# Altium PCB Mach_Dieu_Khien_Binh_Nuoc_Nong.PcbDoc
Units mil, origin at the board's own origin, x right, y up, seen from the top; angles counter-clockwise.
Board outline 4700 x 3120 mil, 2 copper layers (Top Layer, Bottom Layer), stack 65.792 mil thick; 73 components, 63 nets, 232 pads, 29 vias.
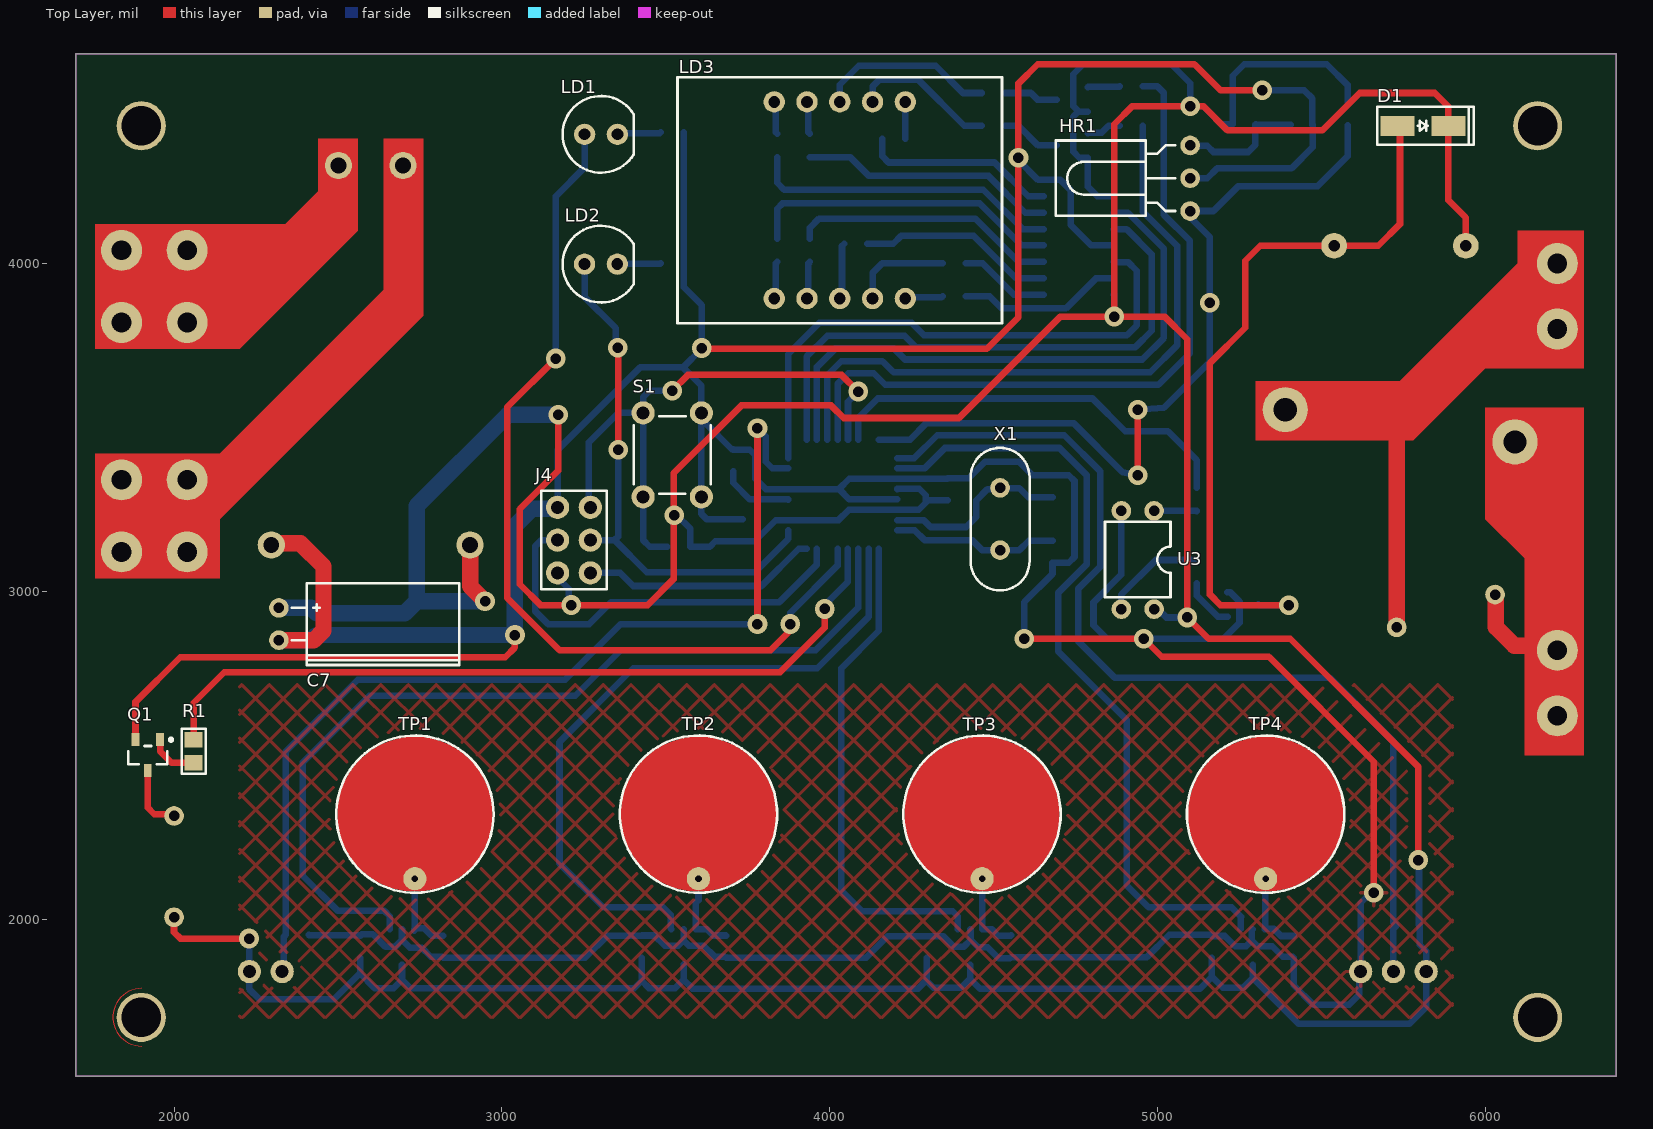
[diagram p0: Top Layer view]
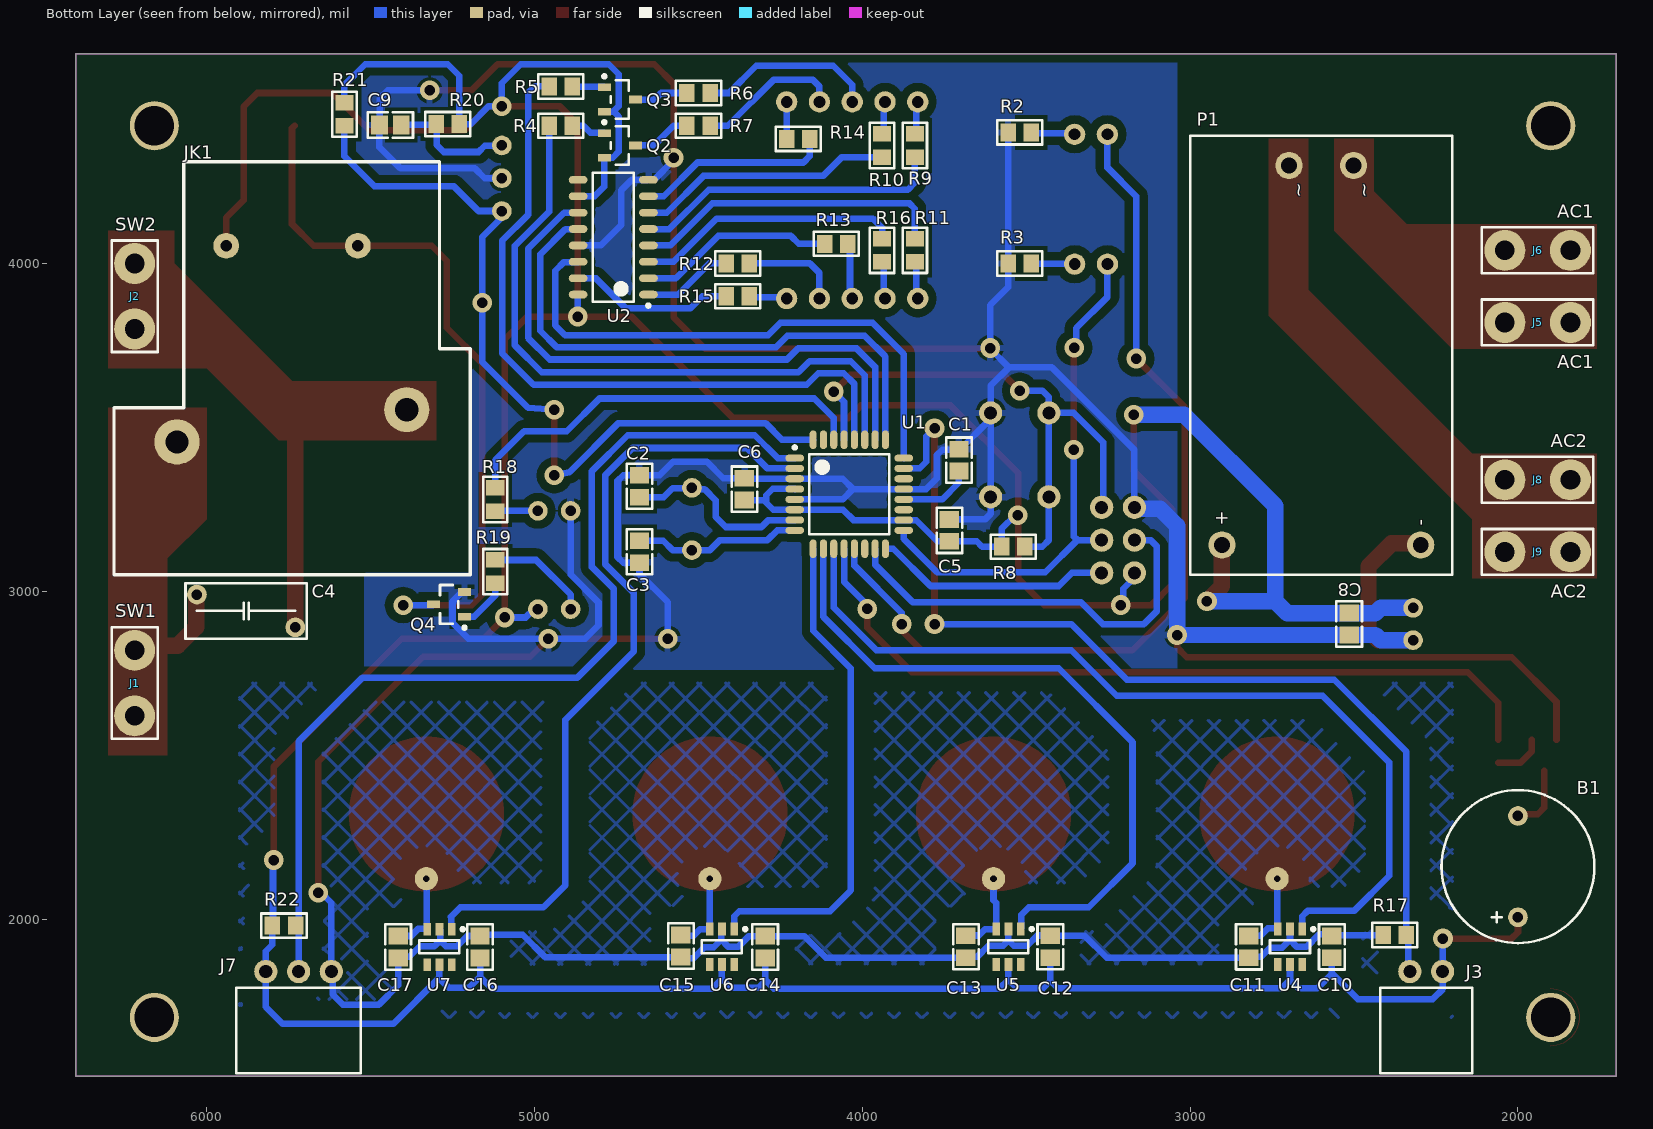
[diagram p1: Bottom Layer view, seen from below]
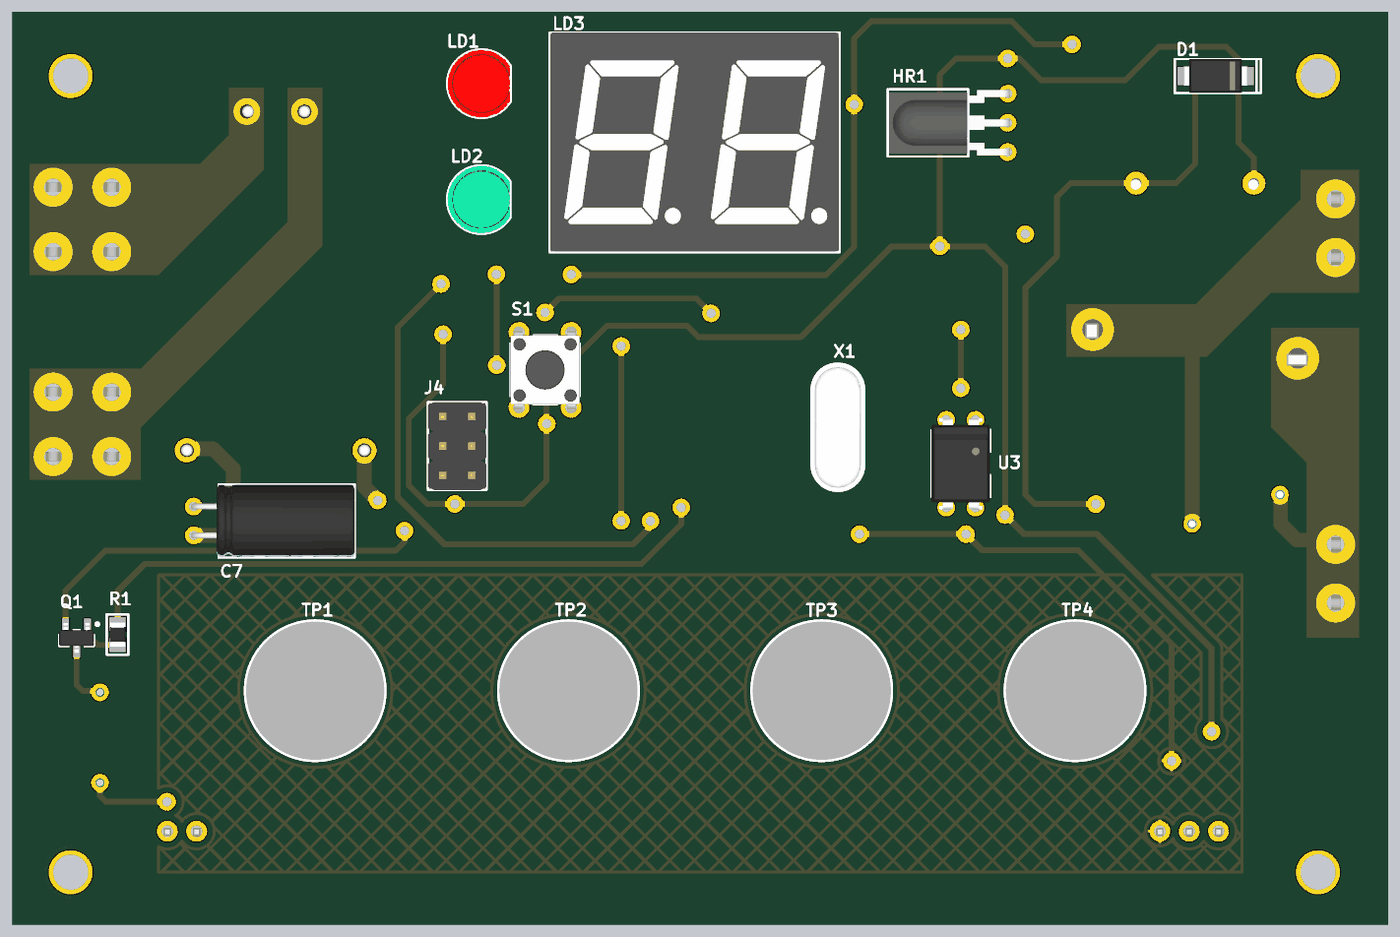
[diagram p2: 3D render of the assembled board from above, using the file's embedded part models]
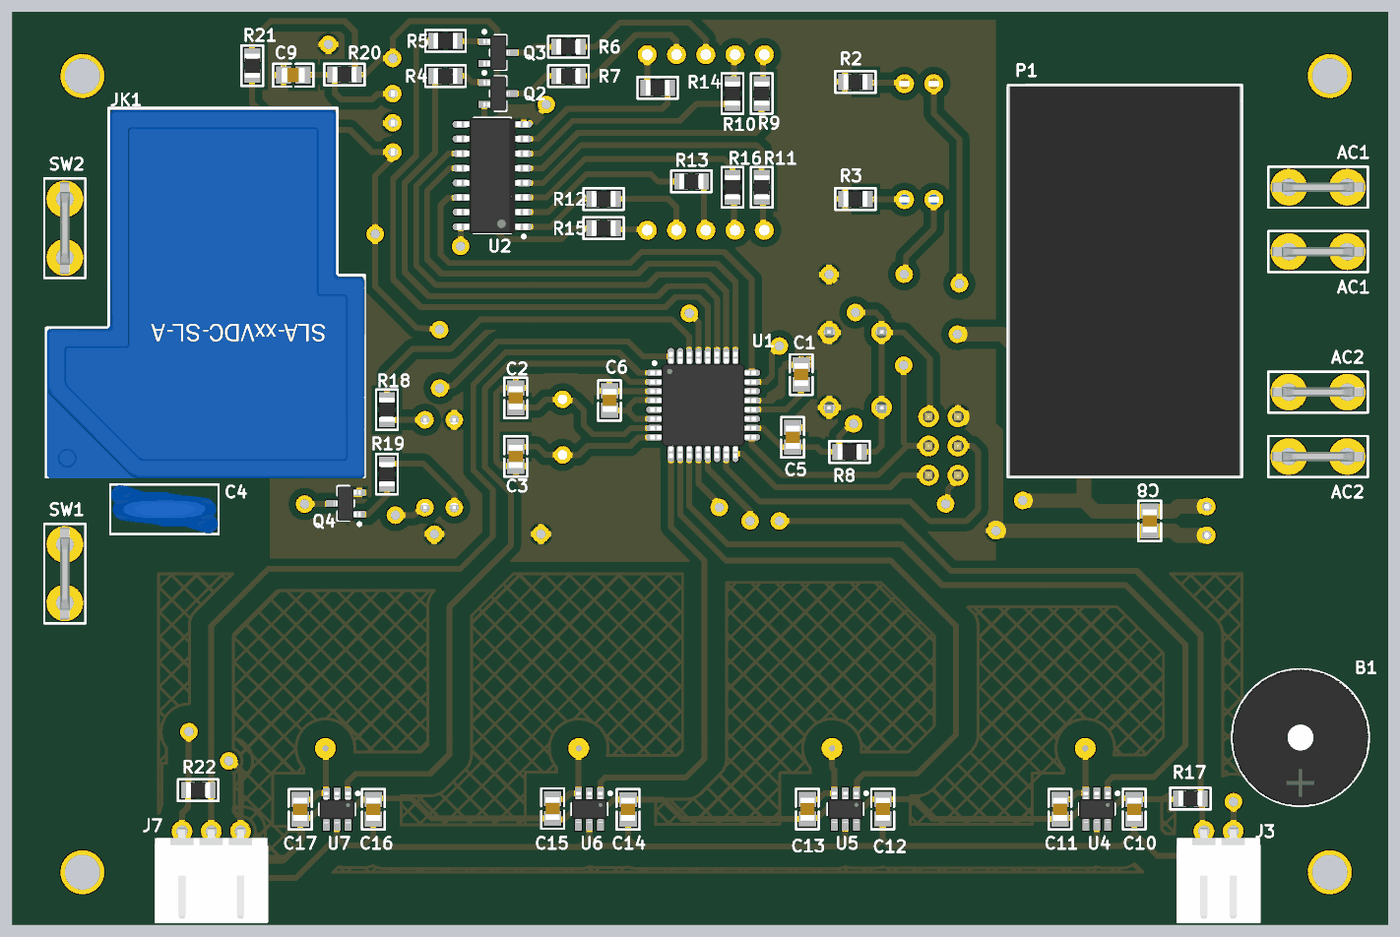
[diagram p3: 3D render of the assembled board from below, using the file's embedded part models]

## Layer stack, top to bottom
Top Solder: solder mask 0.4, Solder Resist, Dk 3.5
Top Layer: signal copper 1.4
Dielectric 1: dielectric 62.9921, FR-4, Dk 4.8
Bottom Layer: signal copper 1.4
Bottom Solder: solder mask 0.4, Solder Resist, Dk 3.5

## Board outline
1700,1520 1700,4640 6400,4640 6400,1520

## Design rules (kind name [scope] priority, off if disabled: settings)
Clearance Clearance_25mil [InNamedPolygon('Bottom Layer-GND')] p1: gap=25 ignorepadtopadclearanceinfootprint=FALSE
Clearance Clearance_60mil [InNamedPolygon('Bottom Touch-GND')] p2: gap=60 ignorepadtopadclearanceinfootprint=FALSE
Clearance Clearance_20mil [InNamedPolygon('Top Touch-GND')] p3: gap=20 ignorepadtopadclearanceinfootprint=FALSE
Clearance [All] p4: gap=7 ignorepadtopadclearanceinfootprint=FALSE
PolygonConnect PolygonConnect_1 [All vs IsNamedPolygon('Bottom Layer-GND')] p1: connectstyle=Relief reliefconductorwidth=20 reliefentries=4 polygonreliefangle="90 Angle" airgapwidth=10
PolygonConnect [All] p2: connectstyle=Relief reliefconductorwidth=10 reliefentries=4 polygonreliefangle="90 Angle" airgapwidth=10
RoutingVias [All] p1: holewidth=28 width=50 viastyle="Through Hole" minholewidth=28 minwidth=50 maxholewidth=32 maxwidth=68
SolderMaskExpansion [All] p1: expansion=4
Width [All] p1: maxlimit=50 minlimit=10 preferedwidth=20
30 further rules are at their usual default settings.

## Classes and differential pairs
component class MD_TOUCH: C10 C11 C12 C13 C14 C15 C16 C17 TP1 TP2 TP3 TP4 U4 U5 U6 U7
component class Mach_Dieu_Khien_Binh_Nuoc_Nong: B1 C1 C2 C3 C4 C5 C6 C7 C8 C9 D1 HR1 J1 J2 J3 J4 J5 J6 J7 J8 J9 JK1 LD1 LD2 LD3 P1 Q1 Q2 Q3 Q4 R1 R2 R3 R4 R5 R6 R7 R8 R9 R10 R11 R12 R13 R14 R15 R16 R17 R18 R19 R20 R21 R22 S1 U1 U2 U3 X1

## Components (designator, comment, footprint, x,y, rotation, side; value= is the part's Value field where it differs from the comment)
B1 "BUZZER" BUZZER-12X8.5MM 2000,2160 r90 bottom
C1 "100nF" C-0805 3705.4,3400 r270 bottom
C2 "22pF" C-0805 4680,3320.54 r90 bottom
C3 "22pF" C-0805 4680,3120.54 r270 bottom
C4 "220nF" C-7.62 5880,2940 r180 bottom
C5 "100nF" C-0805 3734.65,3185.76 r270 bottom
C6 "100nF" C-0805 4360,3311.54 r270 bottom
C7 "470uF" C-ELE-2.5-6.3X12MM-A 2320,2900 r0 top
C8 "100nF" C-0805 2515,2900 r90 bottom
C9 "100nF" C-0805 5440,4422.57 r180 bottom
C10 "100nF" C-0805 2567.95,1915.15 r270 bottom
C11 "22pF" C-0805 2821.17,1915.15 r90 bottom
C12 "100nF" C-0805 3426.75,1915.46 r270 bottom
C13 "22pF" C-0805 3684.18,1915.46 r90 bottom
C14 "100nF" C-0805 4296.4,1914.73 r270 bottom
C15 "22pF" C-0805 4553.83,1917.6 r90 bottom
C16 "100nF" C-0805 5166.32,1914.83 r270 bottom
C17 "22pF" C-0805 5415.99,1914.83 r90 bottom
D1 "M7" SMA_DO-214AC 5820,4420 r0 top
HR1 "VS1838B" VS1838B-A 5100,4260 r90 top
J1 "SW1" FASTON-6.3X0.8MM 6220,2720 r90 bottom
J2 "SW2" FASTON-6.3X0.8MM 6220,3900 r90 bottom
J3 "XH1X2-2.54" XH1X2M-2.54-A 2280,1840 r0 bottom
J4 "JP2X3-2.54" JP2X3M-2.54 3220,3156 r90 top
J5 "AC1" FASTON-6.3X0.8MM 1940,3820 r180 bottom
J6 "AC1" FASTON-6.3X0.8MM 1940,4040 r180 bottom
J7 "XH1X3-2.54" XH1X3M-2.54-A 5720,1840 r0 bottom
J8 "AC2" FASTON-6.3X0.8MM 1940,3340 r180 bottom
J9 "AC2" FASTON-6.3X0.8MM 1940,3120 r0 bottom
JK1 "SLA-5VDC-SL-A" SLA-xxVDC-SL-A 5740,3680 r0 bottom locked
LD1 "LED" LED-5MM-RED 3302.6,4393.89 r0 top
LD2 "LED" LED-5MM-GREEN 3302.4,3997.92 r0 top
LD3 "LED7-0.56IN-2-A" LED7-0.56IN-2 3831,3893 r0 top locked
P1 "HI-LINK-HLK-PM01" HI-LINK-HLK-PMXX 2600,3720 r270 bottom
Q1 "J3Y" SOT23-3L_TO-236AB 1920,2500 r270 top
Q2 "S8550 (2TY)" SOT23-3L_TO-236AB 4740,4360 r180 bottom
Q3 "S8550 (2TY)" SOT23-3L_TO-236AB 4740,4500 r180 bottom
Q4 "J3Y" SOT23-3L_TO-236AB 5261.02,2960 r0 bottom
R1 "1k" R-0805 2060,2511.81 r270 top
R2 "1k" R-0805 3520,4400 r0 bottom
R3 "220R" R-0805 3520,4000 r0 bottom
R4 "2.2k" R-0805 4920,4420 r180 bottom
R5 "2.2k" R-0805 4920,4540 r180 bottom
R6 "10R" R-0805 4500,4520 r0 bottom
R7 "10R" R-0805 4500,4420 r0 bottom
R8 "10k" R-0805 3540,3136 r0 bottom
R9 "220R" R-0805 3840,4360 r90 bottom
R10 "220R" R-0805 3940,4360 r90 bottom
R11 "220R" R-0805 3840,4040 r270 bottom
R12 "220R" R-0805 4380,4000 r180 bottom
R13 "220R" R-0805 4080,4060 r180 bottom
R14 "220R" R-0805 4195.43,4380 r0 bottom
R15 "220R" R-0805 4380,3900 r180 bottom
R16 "220R" R-0805 3940,4040 r270 bottom
R17 "10k" R-0805 2375.88,1951.61 r180 bottom
R18 "1k" R-0805 5120,3280 r270 bottom
R19 "10k" R-0805 5120,3060 r270 bottom
R20 "100R" R-0805 5265,4425 r180 bottom
R21 "10k" R-0805 5580,4455.43 r90 bottom
R22 "10k" R-0805 5764.56,1980 r0 bottom
S1 "SW4P-DIP" SW4P-DIP-6X6MM 3520,3416 r270 top
TP1 "TP-ROUND" TP-ROUND-12MM 2735,2320 r90 top
TP2 "TP-ROUND" TP-ROUND-12MM 3600,2320 r90 top
TP3 "TP-ROUND" TP-ROUND-12MM 4465,2320 r90 top
TP4 "TP-ROUND" TP-ROUND-12MM 5330,2320 r90 top
U1 "ATMEGA328-AU" TQFP32-0.8-7X7MM_MS-026ABA 4040,3296 r180 bottom
U2 "74HC595" SOIC16-1.27-150MIL_MS-012AC 4760,4080 r0 bottom
U3 "PC817" DIP4-2.54-300MIL_BLACK 4940,3095.43 r180 top
U4 "TTP223-BA6" SOT23-6L_MO-178AB 2695.55,1915.15 r270 bottom
U5 "TTP223-BA6" SOT23-6L_MO-178AB 3554.41,1915.46 r270 bottom
U6 "TTP223-BA6" SOT23-6L_MO-178AB 4428.44,1915.15 r270 bottom
U7 "TTP223-BA6" SOT23-6L_MO-178AB 5290.23,1914.83 r270 bottom
X1 "16MHz" XTAL-HC49US 4520,3220.54 r90 top

## Footprints (in the part's own frame and the unit in brackets; to place one, negate y for a bottom-side part, rotate by r counter-clockwise, add the part's x,y. Pads: shape width x height; smd on the part's side, far side on the other; paste and mask are expansions set on the pad)
BUZZER-12X8.5MM [mil]
  round 60 hole 32: 1(-154.53,0) 2(154.53,0)
  silkscreen extent -233,-233 233,233, body extent -233,-233 233,233, height 325
C-7.62 [mil]
  round 60 hole 32: 1(-150,50) 2(150,-50)
  silkscreen extent -185,-85 185,85, body extent -183,-83 183,83, height 457
C-0805 [mm]
  rect 1.3x1.5 smd: 1(-0.85,0) 2(0.85,0)
  silkscreen extent -1.75,-0.99 1.75,0.99, body extent -1,-0.62 1,0.63, height 1
C-ELE-2.5-6.3X12MM-A [mil]
  round 60 hole 32: 1(0,49.21) 2(0,-49.21)
  silkscreen extent 40,-125 550,125, body extent -10,-124 551,124, height 252
DIP4-2.54-300MIL_BLACK [mil]
  round 60 hole 32: 1(-50,-150) 2(50,-150) 3(50,150) 4(-50,150)
  silkscreen extent -100,-116 100,114, body extent -100,-156 100,156, height 189
FASTON-6.3X0.8MM [mil]
  round 125 hole 60: 1(-100,0) 2(100,0)
  silkscreen extent -170,-70 170,70, body extent -157,-16 157,16, height 395
HI-LINK-HLK-PMXX [mil]
  round 83 hole 48: 1(-578.74,98.43) 2(-578.74,-98.43) 3(578.74,-303.15) 4(578.74,303.15)
  silkscreen extent -670,-400 670,400, body extent -669,-398 669,398, height 591
JP2X3M-2.54 [mil]
  round 71 hole 40: 1(-100,-50) 2(-100,50) 3(0,-50) 4(0,50) 5(100,-50) 6(100,50)
  silkscreen extent -150,-100 150,100, body extent -150,-100 150,100, height 337
LED7-0.56IN-2 [mil]
  round 65 hole 36: 1(0,0) 2(100,0) 3(200,0) 4(300,0) 5(400,0) 6(400,600) 7(300,600) 8(200,600) 9(100,600) 10(0,600)
  silkscreen extent -295,-75 695,675, body extent -292,-73 692,675, height 317
LED-5MM-GREEN [mil]
  round 65 hole 36: 1(-50,0) 2(50,0)
  silkscreen extent -117,-117 100,117, body extent -116,-116 98,116, height 339
LED-5MM-RED [mil]
  round 65 hole 36: 1(-50,0) 2(50,0)
  silkscreen extent -117,-117 100,117, body extent -116,-116 98,116, height 339
R-0805 [mm]
  rect 1.2x1.4 smd: 1(-0.9,0) 2(0.9,0)
  silkscreen extent -1.75,-0.94 1.75,0.94, body extent -1.05,-0.67 1.05,0.68, height 0.6
SLA-xxVDC-SL-A [mm] "一组常开，长：32mm，宽：27.6mm，高：20mm"
  round 2 hole 0.9: 1(-5.1,-9.5) 2(5.1,-9.5)
  round 3.5 hole 1.8: 3(8.91,5.7) 4(-8.89,3.2)
  silkscreen extent -13.8,-16 13.8,16, body extent -13.84,-15.87 13.76,16.13, height 20.65
SMA_DO-214AC [mm]
  rect 2.65x1.55 smd: 1(-2.229,0) 2(1.721,0)
  silkscreen extent -3.8,-1.47 3.68,1.47, body extent -3.05,-1.47 2.55,1.48, height 2.9
SOIC16-1.27-150MIL_MS-012AC [mm]
  oval 1.45x0.6 smd: 1(-2.725,4.445) 2(-2.725,3.175) 3(-2.725,1.905) 4(-2.725,0.635) 5(-2.725,-0.635) 6(-2.725,-1.905) 7(-2.725,-3.175) 8(-2.725,-4.445) 9(2.725,-4.445) 10(2.725,-3.175) 11(2.725,-1.905) 12(2.725,-0.635) 13(2.725,0.635) 14(2.725,1.905) 15(2.725,3.175) 16(2.725,4.445)
  silkscreen extent -2.85,-5 1.6,5.42, body extent -3.1,-5 3.1,5, height 1.75
SOT23-3L_TO-236AB [mm]
  rect 1x0.6 smd: 1(-1.2,0.95) 2(-1.2,-0.95) 3(1.2,0)
  silkscreen extent -1.32,-1.5 0.7,1.93, body extent -1.3,-1.5 1.3,1.5, height 1.1
SOT23-6L_MO-178AB [mm]
  rect 1x0.6 smd: 1(-1.375,0.95) 2(-1.375,0) 3(-1.375,-0.95) 4(1.375,-0.95) 5(1.375,0) 6(1.375,0.95)
  silkscreen extent -1.5,-1.55 0.5,1.92, body extent -1.5,-1.52 1.5,1.53, height 1.45
SW4P-DIP-6X6MM [mil]
  round 71 hole 40: 1(-128,89) 2(-128,-89) 3(128,-89) 4(128,89)
  silkscreen extent -118,-118 118,118, body extent -151,-118 151,118, height 200
TP-ROUND-12MM [mil]
  round 71 hole 20: 1(-196.85,0)
  Top Layer region: 0,-236.22 -90.4,-218.24 -167.03,-167.03 -218.24,-90.4 -236.22,0 -236.22,0 -218.24,90.4 -167.03,167.03 -90.4,218.24 0,236.22 0,236.22 90.4,218.24 167.03,167.03 218.24,90.4 236.22,0 236.22,0 218.24,-90.4 167.03,-167.03 90.4,-218.24 0,-236.22
  silkscreen extent -240,-240 240,240
TQFP32-0.8-7X7MM_MS-026ABA [mm]
  oval 1.45x0.55 smd: 1(-4.225,2.8) 2(-4.225,2) 3(-4.225,1.2) 4(-4.225,0.4) 5(-4.225,-0.4) 6(-4.225,-1.2) 7(-4.225,-2) 8(-4.225,-2.8) 17(4.225,-2.8) 18(4.225,-2) 19(4.225,-1.2) 20(4.225,-0.4) 21(4.225,0.4) 22(4.225,1.2) 23(4.225,2) 24(4.225,2.8)
  oval 0.55x1.45 smd: 9(-2.8,-4.225) 10(-2,-4.225) 11(-1.2,-4.225) 12(-0.4,-4.225) 13(0.4,-4.225) 14(1.2,-4.225) 15(2,-4.225) 16(2.8,-4.225) 25(2.8,4.225) 26(2,4.225) 27(1.2,4.225) 28(0.4,4.225) 29(-0.4,4.225) 30(-1.2,4.225) 31(-2,4.225) 32(-2.8,4.225)
  silkscreen extent -4.35,-3.1 3.1,3.75, body extent -4.6,-4.6 4.6,4.6, height 1.2
VS1838B-A [mil]
  round 60 hole 32: 1(-100,0) 2(0,0) 3(100,0)
  silkscreen extent -115,45 115,410, body extent -112,-8 112,405, height 173
XH1X2M-2.54-A [mil]
  round 71 hole 40: 1(-50,0) 2(50,0)
  silkscreen extent -140,50 140,310, body extent -142,-10 142,307, height 230
XH1X3M-2.54-A [mil]
  round 71 hole 40: 1(-100,0) 2(0,0) 3(100,0)
  silkscreen extent -190,50 190,310, body extent -192,-10 192,307, height 230
XTAL-HC49US [mil]
  round 60 hole 32: 1(-95,0) 2(95,0)
  silkscreen extent -218,-90 217,90, body extent -217,-88 215,88, height 142

## Part data
B1: "Cac Loai Coi Xung/Chip"
C1 C2 C3 C4 C5 C6 C8 C9 C10 C11 C12 C13 C14 C15 C16 C17: library part CAP, "Cac Loai Tu"
C7: library part CAP-ELE, "Cac Loai Tu Hoa"
D1: library part "1N4007 (M7)", "Diode Chinh Luu 1A 1000V"
HR1: "Module Giai Ma IR"
J1 J2 J5 J6 J8 J9: library part FASTON-2P, "Dau Ket Noi Faston 2 Chan"
J3: "Header 2 Chan XH 2.54mm"
J4: "Jump Doi 3 Chan 2.54mm"
J7: "Header 3 Chan XH 2.54mm"
JK1: library part SLA-24VDC-SL-A, "24V????"
LD1 LD2: "Cac Loai LED Don"
LD3: "LED 7 Thanh 0.56 Inch 2 So Anot"
P1: "Nguon Hi-Link HLK-PM01 5V 3W"
Q1 Q4: library part "S8050 (J3Y)", "Transistor NPN 0.5A 40V"
Q2 Q3: "Transistor PNP 0.5A 40V"
R1 R2 R3 R4 R5 R6 R7 R8 R9 R10 R11 R12 R13 R14 R15 R16 R17 R18 R19 R20 R21 R22: library part RES, "Cac Loai Dien Tro"
S1: "Nut Nhan 4 Chan Cac Loai"
TP1 TP2 TP3 TP4: "Cac Loai Nut Cam Ung Cham Tron"
U1: "VDK 8-Bit AVR"
U2: "IC Mo Rong Ngo Ra"
U3: "Opto Quang Transistor"
U4 U5 U6 U7: "IC Cam Ung Cham 1 Kenhpr"
X1: library part XTAL-HC49, "Thach Anh 2 Chan HC49"

## Free pads (board coordinates)
  round 150 hole 120: 2(1900,1700) 3(6160,1700) 4(6160,4420) 5(1900,4420)

## Via types
v1: diameter 60, hole 32, Top Layer to Bottom Layer, 29 vias

## Nets (pads, with @x,y where several pads share a name; then routed paths per layer and width w, separated by ;. In a path a pad name is that pad's centre, name@x,y a point inside that pad or via, vN(x,y) a via of type N, cw(c..) or ccw(c..) an arc to the next point about the centre after c; other vN are vias at no path point)
+5: B1.1 C5.2 C6.2 C7.1 C8.2 C10.2 C12.2 C14.2 C16.2 D1.2 J3.1 J4.2 J7.3 JK1.2 P1.3 Q2.2 Q3.2 R8.2 R20.2 R21.2 R22.2 U1.4 U1.6 U1.18 U2.10 U2.16 U3.4 U4.5 U5.5 U6.5 U7.5 | length 17428.6
  Top Layer w20: B1.1 2000,1960 2019.51,1940.49 v1(2229,1940.49) ; v1(3171.75,3538) 3171.75,3367.75 3054.7,3250.7 3054.7,3021.3 3118,2958 v1(3212,2958) 3445,2958 3524,3037 3524,3230 v1(3526,3232) 3536.82,3232 3524,3244.82 3524,3360.16 3730.84,3567 4004.55,3567 4042.99,3528.56 4394.56,3528.56 4704.11,3838.11 v1(4868.54,3838.11) ; v1(5796.16,2180) 5796.16,2463.84 5405,2855 5156.03,2855 v1(5091.03,2920) 5091.03,3768.97 5021.89,3838.11 v1(4868.54,3838.11) ; JK1.2 5940.79,4140 5887.76,4193.03 D1.2 5887.76,4478 5845.76,4520 5617,4520 5503,4406 5214,4406 5140,4480 v1(5100,4480) 4924,4480 4868.54,4424.54 v1(4868.54,3838.11)
  Top Layer w50: C7.1 C7.1@2320,2951.92 ; P1.3 2903.15,3015.35 v1(2948.75,2969.75)
  Bottom Layer w20: v1(2229,1940.49) 2229,1841 J3.1 2229,1839 2229,1787 2260,1756 2488.81,1756 2567.95,1835.15 C10.2 ; 2567.95,1833.11 2611.92,1789.15 2669.99,1789.15 2695.55,1814.71 ; U4.5 2695.55,1814.71 ; J4.2 3170,3042.2 3204.35,3007.85 3204.35,2965.65 v1(3212,2958) ; C12.2 3426.75,1811.71 ; v1(3526,3232) 3533.98,3232 3575.44,3190.54 R8.2 3635,3136 3651.3,3152.3 C5.2 3771.3,3152.3 3835.94,3216.94 3873.35,3216.94 U1.18 4027.26,3217.26 4058.76,3248.76 U1.6 4271.76,3248.76 4293,3270 ; U5.5 3554.41,1815.09 ; U1.4@4206,3312 4206.42,3312.42 4273.58,3312.42 4293,3293 4293,3270 ; C14.2@4296.44,1881.23 4296.44,1810.64 ; C6.2 4301.07,3278.07 4293,3270 ; U6.5 4428.44,1817.96 ; Q3.2 4757.41,4462.6 ; U2.16 4868.46,3903.82 4868.46,3838.18 v1(4868.54,3838.11) ; U2.10 4866.59,4205.69 4816.31,4205.69 4787.24,4234.76 Q2.2 4761.65,4322.6 4743,4341.25 4743,4448.19 4757.41,4462.6 ; U3.4 5002.19,2945.43 5027.62,2920 v1(5091.03,2920) ; C16.2 5166.32,1823.83 ; U7.5 5291.32,1859.61 5291.32,1819.83 ; R21.2 5580,4544.49 5516.49,4608 5265,4608 5229.56,4572.56 R20.2 5195,4425 5140,4480 v1(5100,4480) 5100,4550 5042,4608 4774,4608 4743,4577 4743,4480 4757.41,4465.59 4757.41,4462.6 ; v1(5796.16,2180) 5798.08,2178.08 5798.08,1981.92 R22.2 5800,1921.61 5820,1901.61 J7.3 5820,1731.9 5768.1,1680 5431.15,1680 5291.32,1819.83 ; 2695.55,1814.71 2721.27,1789 3404.03,1789 3426.75,1811.71 ; 3426.75,1811.71 3449,1789.46 3528.78,1789.46 3554.41,1815.09 ; 3554.41,1815.09 3581.5,1788 4270.29,1788 4292.94,1810.64 4296.44,1810.64 ; 4296.44,1810.64 4316.94,1790.15 4400.63,1790.15 4428.44,1817.96 ; 4428.44,1817.96 4459.39,1787 5129.49,1787 5166.32,1823.83 ; 5166.32,1823.83 5199.32,1790.83 5262.32,1790.83 5291.32,1819.83
  Bottom Layer w50: C7.1 2419.25,2949.21 2435,2933.46 C8.2 2704.46,2933.46 2740,2969 ; v1(2948.75,2969.75) 2948,2969 2740,2969 ; v1(3171.75,3538) 3018,3538 2740,3260 2740,2969
BUZZER: R1.1 U1.12 | length 2402.4
  Top Layer w20: R1.1 2060,2660 2153,2753 3848.75,2753 3985,2889.25 v1(3985,2946)
  Bottom Layer w20: v1(3985,2946) 3985,2958 4055.75,3028.75 U1.12
DS18B20: J7.2 R22.1 U1.1 | length 3037.1
  Bottom Layer w20: U1.1 4258.31,3406.24 4328.07,3476 4715.54,3476 4825,3366.54 4825,3074 4758,3007 4758,2848 4869.4,2736.6 5524.67,2736.6 5720,2541.27 5720,1989.13 R22.1 5719.98,1970.85 J7.2
GND: C1.1 C2.2 C3.2 C5.1 C6.1 C7.2 C8.1 C9.1 C10.1 C11.1 C12.1 C13.1 C14.1 C15.1 C16.1 C17.1 HR1.2 J4.6 J7.1 P1.4 Q1.2 Q4.2 R2.2 R3.2 R17.1 S1.1 S1.4 U1.3 U1.5 U1.21 U2.8 U2.13 U3.2 U4.2 U5.2 U6.2 U7.2 | length 17614.7
  Top Layer w20: Q1.2 1882.6,2662.6 2019,2799 3010.24,2799 3040,2828.76 v1(3040,2866.54) ; v1(3610,3742) 3612,3740 4480,3740 4576,3836 v1(4576,4322.6) 4576,4549 4635,4608 5113,4608 5193,4528 v1(5320,4528) ; v1(4594,2855) v1(4958,2855) 5013,2800 5340,2800 5660,2480 v1(5660,2080)
  Top Layer w50: P1.4 2301.59,3146 2386,3146 2456,3076 2456,2880.08 2426.71,2850.79 C7.2
  Bottom Layer w20: R17.1 2412.81,1950.11 2566.45,1950.11 C10.1 2572.99,1953.65 2606.95,1953.65 2645.45,1915.15 2674.12,1915.15 2695.55,1936.58 ; U4.2 2695.55,1936.58 ; J4.6 3170,3431 3422,3683 3553,3683 ; U5.2 3554.41,1934.83 ; R2.2 R3.2 3555.44,3927.56 3610,3873 v1(3610,3742) 3610,3740 3553,3683 ; S1.1@3618.76,3516.16 3701.46,3433.46 C1.1 3706.86,3432 3756.61,3432 3773.65,3414.96 3773.65,3343.1 3805,3311.75 U1.21 4028.25,3311.75 ; C5.1 3625.77,3219.23 3609,3236 S1.4 S1.1 3609,3627 3553,3683 ; U1.5 4059.75,3280.25 4028.25,3311.75 ; U6.2 4430.25,1967.47 4430.25,1936.8 ; v1(4576,4322.6) 4576,4314.98 4635.98,4255 U2.8 4704,4255 4735,4224 4735,4118 4798,4055 U2.13 ; v1(4594,2855) 4594,2967 4680,3053 C3.2 4729.54,3087.07 4747,3104.54 4747,3336.54 4729.54,3354 C2.2 4618.54,3354 4577,3395.54 4475,3395.54 4424.46,3345 C6.1 4358.56,3343.56 4206.65,3343.56 U1.3 4059.75,3343.24 4028.25,3311.75 ; U3.2 4890,3051 4805,2966 4805,2896 4846,2855 v1(4958,2855) 5201.71,2855 5250.46,2903.75 5250.46,2968.59 5221.65,2997.4 Q4.2 ; HR1.2 5152,4260 5181.92,4289.92 5408.92,4289.92 5473.46,4354.46 C9.1 5473,4423.03 5473,4503 5448,4528 v1(5320,4528) ; U7.2 5288.42,1967.15 5288.42,1934.91 ; v1(5660,2080) 5650.2,2080 5620,2049.8 J7.1 5616,1836 5616,1770 5585,1739 5475,1739 5415.99,1798.01 C17.1 5412.53,1884.83 5382.32,1884.83 5350.32,1916.83 5305.72,1916.83 5288.42,1934.13 5288.42,1934.91 ; 2695.55,1936.58 2718.99,1913.15 2754.99,1913.15 2782.99,1885.15 2817.71,1885.15 C11.1 3254.81,1881.68 3322.05,1948.93 C12.1 3427.63,1949.81 3465.75,1949.81 3497.09,1918.46 3538.04,1918.46 3554.41,1934.83 ; 3554.41,1934.83 3570.78,1918.46 3615.78,1918.46 3648.78,1885.46 3680.71,1885.46 C13.1 4111,1882 4177.19,1948.19 C14.1 4346.18,1948.19 4379.23,1915.15 4408.59,1915.15 4430.25,1936.8 ; 4430.25,1936.8 4453.16,1913.89 4482.05,1913.89 4516.09,1879.86 4549.56,1879.86 C15.1 4968.14,1884.14 5036,1952 5162.61,1952 C16.1 5205.32,1948.3 5236.78,1916.83 5270.35,1916.83 5288.42,1934.91
  Bottom Layer w50: C7.2 2419.25,2850.79 2435,2866.54 C8.1 v1(3040,2866.54) 3040,3200 3091.98,3251.98 3165.98,3251.98 J4.6
INFRARED: HR1.1 R21.1 U1.32 | length 2480
  Top Layer w20: v1(4940,3353.57) v1(4940,3553.57)
  Bottom Layer w20: U1.32 4245.34,3462.34 4296,3513 4744,3513 4893.65,3363.35 v1(4940,3353.57) ; v1(4940,3553.57) 5020,3560 5160,3700 v1(5160,3880) 5160,4080 5100,4140 HR1.1 5171,4160 5247,4236 5489,4236 5580,4327 R21.1 R21.1@5580,4421
LED7_DIG1: R5.1 U1.28 | length 2212.1
  Bottom Layer w20: U1.28 4024.25,3632.25 4057,3665 4134.56,3665 4169.56,3630 5003,3630 5099,3726 5099,4069 5020,4148 5020,4520 5000,4540 R5.1
LED7_DIG2: R4.1 U1.27 | length 2043.1
  Bottom Layer w20: U1.27 3992.76,3659.03 4035.72,3702 4161,3702 4195,3668 4978,3668 5060,3750 5060,4054 4955.43,4158.57 R4.1
LED7_DS: U1.24 U2.14 | length 1696.3
  Bottom Layer w20: U1.24 3873.66,3723.66 3969,3819 4250,3819 4288,3781 4907,3781 4937,3811 4937,3978 4910.69,4004.31 4867.98,4004.31 U2.14
LED7_Q0: R15.1 U2.15 | length 505.3
  Bottom Layer w20: R15.1 4488,3900 4525,3863 4721,3863 4812.31,3954.31 4866.59,3954.31 U2.15
LED7_Q1: R12.1 U2.1 | length 276.6
  Bottom Layer w20: R12.1 4467,4000 4562,3905 U2.1
LED7_Q2: R13.1 U2.2 | length 600.7
  Bottom Layer w20: R13.1 4194,4060 4218,4084 4440,4084 4569,3955 U2.2
LED7_Q3: R16.1 U2.3 | length 812.6
  Bottom Layer w20: R16.1 3940,4109 3968,4137 4444,4137 4576,4005 U2.3
LED7_Q4: R11.1 U2.4 | length 963.9
  Bottom Layer w20: R11.1 3840,4167 3856,4183 4458,4183 4586,4055 U2.4
LED7_Q5: R9.1 U2.5 | length 949.7
  Bottom Layer w20: R9.1 3840,4246 3861,4225 4469,4225 4589,4105 U2.5
LED7_Q6: R10.1 U2.6 | length 783
  Bottom Layer w20: R10.1 4062.43,4324.57 4120,4267 4485,4267 4597,4155 U2.6
LED7_Q7: R14.1 U2.7 | length 595.7
  Bottom Layer w20: R14.1 4161,4379 4161,4327 4180,4308 4503,4308 4606,4205 U2.7
LED7_SHCP: U1.26 U2.11 | length 1815.9
  Bottom Layer w20: U1.26 3961.26,3684.27 4017.99,3741 4196,3741 4230,3707 4954,3707 5020,3773 5020,4045 4910,4155 U2.11
LED7_STCP: U1.25 U2.12 | length 1747.9
  Bottom Layer w20: U1.25 3929.76,3715.76 3993,3779 4229,3779 4263,3745 4933,3745 4983,3795 4983,4027.43 4905.43,4105 U2.12
LED_POWER: LD1.1 U1.13 | length 2776.1
  Top Layer w20: v1(3165,3710) 3016.24,3561.24 3016.24,2980 3176.24,2820 3820,2820 3880,2880 v1(3880,2900)
  Bottom Layer w20: v1(3165,3710) 3165,4205 3252.6,4292.6 LD1.1 ; v1(3880,2900) 3880,2934 4024.25,3078.25 U1.13
MISO: J4.1 U1.16 | length 723.4
  Bottom Layer w20: J4.1 3361,3056 3401,3016 3792,3016 3905.66,3129.66 U1.16
MOSI: J4.4 U1.15 | length 1273
  Bottom Layer w20: J4.4 3121,3156 3101.54,3136.54 3101.54,2939.7 3141.24,2900 3267,2900 3334,2967 3847,2967 3961.26,3081.26 U1.15
NetB1_2: B1.2 Q1.3 | length 203.3
  Top Layer w20: Q1.3 1920,2340 1940,2320 1994.53,2320 B1.2
NetC1_2: C1.2 U1.20 | length 225
  Bottom Layer w20: C1.2 3705.86,3366.07 3705.86,3331 3756.61,3280.25 U1.20 U1.20@3873.35,3279.94
NetC2_1: C2.1 U1.7 X1.2 | length 573.4
  Bottom Layer w20: U1.7 4286.74,3217.26 4308,3196 4417,3196 4448,3227 4448,3277.54 4482,3311.54 4516,3311.54 X1.2 4521,3314.54 4579,3314.54 4606.46,3287.07 C2.1
NetC3_1: C3.1 U1.8 X1.1 | length 511.2
  Bottom Layer w20: U1.8 4259.94,3185.76 4289.71,3156 4434.54,3156 4466,3124.54 4519,3124.54 X1.1 4579,3125.54 4607.46,3154 C3.1
NetC4_1: C4.1 J1.1 J1.2 JK1.3 | length 1209.2
  Top Layer w50: C4.1 6031.91,2988.09 6031.91,2890.79 6088.36,2834.35 6205.65,2834.35 J1.2 ; JK1.3 6220,3326.38 J1.2 ; J1.1 J1.2
  Bottom Layer w50: C4.1 C4.1@6032.71,2990
NetC4_2: C4.2 J2.1 J2.2 JK1.4 | length 1814.1
  Top Layer w50: JK1.4 5774.02,3554.02 ; C4.2 5730,3510 5774.02,3554.02 ; J2.2 J2.1 6020,3800 5774.02,3554.02
NetC9_2: C9.2 HR1.3 R20.1 | length 387.9
  Bottom Layer w20: HR1.3 5101,4359 5152,4359 5171,4340 5277,4340 5299,4362 5299,4421.57 5298,4422.57 R20.1 5301.64,4423.79 5405.32,4423.79 C9.2
NetC11_2: C11.2 TP1.1 U4.3 | length 259
  Bottom Layer w20: TP1.1 2733.98,2122.13 2733.98,1970.3 U4.3 2732.95,1965.18 2739.09,1971.31 2763.55,1971.31 2785.72,1949.15 2820.64,1949.15 C11.2
NetC13_2: C13.2 TP2.1 U5.3 | length 255.9
  Bottom Layer w20: U5.3 3591.81,2049.46 3600,2057.65 TP2.1 ; U5.3@3593.78,1969.59 3625.39,1969.59 3645.18,1949.81 3683.29,1949.81 C13.2
NetC15_2: C15.2 TP3.1 U6.3 | length 251.3
  Bottom Layer w20: TP3.1 4465.42,2122.73 4465.42,1969.7 U6.3 4494.5,1969.28 4514.63,1949.15 4551.92,1949.15 C15.2
NetC17_2: C17.2 TP4.1 U7.3 | length 251.9
  Bottom Layer w20: U7.3 5328.82,1970.15 U7.3@5328.82,1970.2 ; TP4.1 5328.82,2121.97 U7.3@5328.82,1970.2 ; C17.2 5376.99,1948.3 5354.46,1970.83 5329.45,1970.83 U7.3@5328.82,1970.2
NetD1_1: D1.1 JK1.1 Q4.3 | length 2232.5
  Top Layer w20: v1(5401,2957.64) 5192.36,2957.64 5160,2990 5160,3696 5268,3804 5268,4008 5314.02,4054.02 JK1.1 5674.02,4054.02 5740,4120 5740,4412.24 D1.1
  Bottom Layer w20: Q4.3 5310.62,2957.64 v1(5401,2957.64)
NetJ5_1: J5.1 J5.2 J6.1 J6.2 P1.1 | length 1500.8
  Top Layer w50: P1.1 2501.57,4141.57 2400,4040 J6.1 ; J6.1 J5.1 J5.2 J6.2 J6.1
NetJ8_1: J8.1 J8.2 J9.1 J9.2 P1.2 | length 2153.5
  Top Layer w50: P1.2 2698.43,3858.43 2180,3340 J8.1 ; J8.1 J8.2 J9.1 J9.2 J8.1
NetLD1_2: LD1.2 R2.1 | length 134.5
  Bottom Layer w20: LD1.2 3355.66,4396.94 3481.51,4396.94 R2.1
NetLD2_2: LD2.2 R3.1 | length 133
  Bottom Layer w20: LD2.2 3353.44,3998.96 3483.53,3998.96 R3.1
NetLD3_1: LD3.1 R11.2 | length 115.3
  Bottom Layer w20: LD3.1 3835.5,3897.5 3835.5,4000.06 R11.2
NetLD3_2: LD3.2 R16.2 | length 115.3
  Bottom Layer w20: LD3.2 3935.5,3897.5 3935.5,4000.06 R16.2
NetLD3_3: LD3.3 R13.2 | length 172.6
  Bottom Layer w20: LD3.3 4037.78,3899.78 4037.78,4053.22 R13.2
NetLD3_4: LD3.4 R12.2 | length 303.6
  Bottom Layer w20: LD3.4 4131,3971 4160,4000 R12.2
NetLD3_5: LD3.5 R15.2 | length 116.5
  Bottom Layer w20: LD3.5 4234.5,3896.5 4341.06,3896.5 R15.2
NetLD3_6: LD3.6 R14.2 | length 113.1
  Bottom Layer w20: R14.2 4230.93,4380.07 4230.93,4492.93 LD3.6
NetLD3_7: LD3.7 R7.1 | length 447.7
  Bottom Layer w20: LD3.7 4131,4540 4152,4561 4270,4561 4411,4420 R7.1
NetLD3_8: LD3.8 R6.1 | length 544
  Bottom Layer w20: LD3.8 4031,4545 4089,4603 4324,4603 4407,4520 R6.1
NetLD3_9: LD3.9 R10.2 | length 101.3
  Bottom Layer w20: LD3.9 3935.5,4488.5 3935.5,4399.94 R10.2
NetLD3_10: LD3.10 R9.2 | length 101.3
  Bottom Layer w20: LD3.10 3835.5,4488.5 3835.5,4399.94 R9.2
NetQ1_1: Q1.1 R1.2 | length 152.7
  Top Layer w20: Q1.1 1957.4,2511.81 1992.84,2476.37 R1.2
NetQ2_1: Q2.1 R4.2 | length 106.7
  Bottom Layer w20: Q2.1 4789.06,4399.21 4830.21,4399.21 4851,4420 R4.2
NetQ2_3: Q2.3 R7.2 | length 182.2
  Bottom Layer w20: R7.2 4576,4420 4636,4360 Q2.3
NetQ3_1: Q3.1 R5.2 | length 98.4
  Bottom Layer w20: Q3.1 4788.54,4538.7 4883.26,4538.7 R5.2
NetQ3_3: Q3.3 R6.2 | length 165.6
  Bottom Layer w20: R6.2 4614,4520 4634,4500 Q3.3
NetQ4_1: Q4.1 R19.2 | length 158
  Bottom Layer w20: R19.2 5120,2987 5184.4,2922.6 Q4.1
NetR18_2: R18.2 U3.1 | length 130.4
  Bottom Layer w20: U3.1 4990.43,3245 5119.57,3245 R18.2
NetR19_1: R19.1 U3.3 | length 318.2
  Bottom Layer w20: U3.3 4890,2990 4995.43,3095.43 R19.1
NTC10K: J3.2 R17.2 U1.23 | length 3062.6
  Top Layer w20: v1(3780,2900) v1(3780,3497.32)
  Bottom Layer w20: J3.2 2335.22,1845.22 2335.22,1946.39 R17.2 2340.44,2510.15 2560.29,2730 3193,2730 3363,2900 v1(3780,2900) ; v1(3780,3497.32) 3805,3472.32 3805,3395 3824.94,3375.06 3873.35,3375.06 U1.23
RELAY: R18.1 U1.30 | length 1285.9
  Bottom Layer w20: U1.30 4087.56,3462.65 4087.56,3528.56 4147,3588 4802,3588 4902,3488 5032,3488 5120,3400 R18.1
RST: J4.5 R8.1 S1.2 S1.3 U1.29 | length 1786.6
  Top Layer w20: v1(3520,3612.09) 3567.91,3660 4036.45,3660 v1(4087.22,3609.22)
  Bottom Layer w20: J4.5 3265,3261 3265,3454 3355,3544 S1.2 ; R8.1 3451,3136 3431,3156 S1.3 S1.2 ; v1(3520,3612.09) 3451,3612.09 3431,3592.09 S1.2 ; U1.29 4056.06,3462.65 4056.06,3578.06 v1(4087.22,3609.22)
SCK: J4.3 LD2.1 U1.17 | length 1601.4
  Top Layer w20: v1(3353.7,3742.7) 3355,3741.4 v1(3355,3432)
  Bottom Layer w20: LD2.1 3252.4,3897.6 3347.3,3802.7 3347.3,3749.1 v1(3353.7,3742.7) ; J4.3 3344,3156 ; v1(3355,3432) 3355,3167 3344,3156 ; U1.17 3873.66,3159.66 3772,3058 3442,3058 3344,3156
TOUCH1: U1.2 U7.1 | length 2440.1
  Bottom Layer w20: U1.2 4289.5,3374.74 4351.76,3437 4701.28,3437 4785,3353.28 4785,3083 4697,2995 4697,2817 4906,2608 4906,2103 4973,2036 5226,2036 5255,2007 5254.64,2006.64 5254.64,1970.78 U7.1
TOUCH2: U1.9 U6.1 | length 1517.1
  Bottom Layer w20: U1.9 4150.24,2879.24 4035.57,2764.57 4035.57,2087.43 4098.88,2024.12 4375.45,2024.12 4391.03,2008.53 U6.1
TOUCH3: U1.10 U5.1 | length 2127.2
  Bottom Layer w20: U5.1 3515.2,1971.41 3515.2,2012.8 3492,2036 3309.73,2036 3176,2169.73 3176,2540 3401,2765 3962,2765 4118.74,2921.74 U1.10
TOUCH4: U1.11 U4.1 | length 2770.9
  Bottom Layer w20: U4.1 2658.15,2008.75 2641.9,2025 2500,2025 2392.99,2132.01 2392.99,2477.84 2596.15,2681 3224,2681 3363,2820 3957,2820 4087.24,2950.24 U1.11
pads on no net: U1.14 U1.19 U1.22 U1.31 U2.9 U4.4 U4.6 U5.4 U5.6 U6.4 U6.6 U7.4 U7.6
copper on no net: | length 678.5
  Top Layer w0.5: 1901.78,1612.2 cw(c1901.53,1700.45) 1901.78,1788.69
  Top Layer w20: 1922.78,4420.14 ccw(c1902.91,4420.14) 1922.78,4420.14 ; 6179.19,1698.3 ccw(c6157.33,1698.3) 6179.19,1698.3 ; 6180.76,4417.99 ccw(c6158.71,4417.99) 6180.76,4417.99

## Polygon pours and split planes (outlines as drawn)
GND on Bottom Layer "Bottom Layer-GND" (solid, remove dead copper, pour order 4): 3040,4660 5700,4660 5700,4300 5540,4140 5260,4140 5192.36,4072.36 5192.36,3056.43 5516.43,3056.43 5520,3060 5520,2760 3040,2760
GND on Bottom Layer "Bottom Touch-GND" (hatched 45Degree grid 60 track 10, pour order 0): 2200,2720 5900,2720 5900,1700 2200,1700
GND on Top Layer "Top Touch-GND" (hatched 45Degree grid 60 track 10, pour order 2): 2200,2715.29 5900,2715.29 5900,1700 2200,1700

## Keep-outs
Keep-Out Layer:
  the board outline again, w3.94

## Other copper
Top Layer:
  region net NetC4_1: 6000,3560 6300,3560 6300,2500 6120,2500 6120,3100 6000,3220
  region net NetC4_2: 5300,3640 5740,3640 6100,4000 6100,4100 6300,4100 6300,3680 6000,3680 5780,3460 5300,3460
  region net NetJ8_1: 1760,3420 2140,3420 2640,3920 2640,4380 2760,4380 2760,3840 2140,3220 2140,3040 1760,3040
  region net NetJ5_1: 1760,4120 2340,4120 2440,4220 2440,4380 2560,4380 2560,4100 2200,3740 1760,3740

## Text inside footprints (layer, text, board x,y; h text height)
P1: Bottom Overlay "-" at 2280,3200 h40 r270; Bottom Overlay "~" at 2450,4200 h40 r270; Bottom Overlay "~" at 2650,4200 h40 r270; Bottom Overlay "+" at 2885,3200 h40 r270